# Altium PCB OLED_Board.PcbDoc
Units mil, origin at the board's own origin, x right, y up, seen from the top; angles counter-clockwise.
Board outline 1360 x 485 mil, 2 copper layers (Top Layer, Bottom Layer); 16 components, 13 nets, 47 pads, 48 vias.
Unrouted connection lines stored in the file: 9.
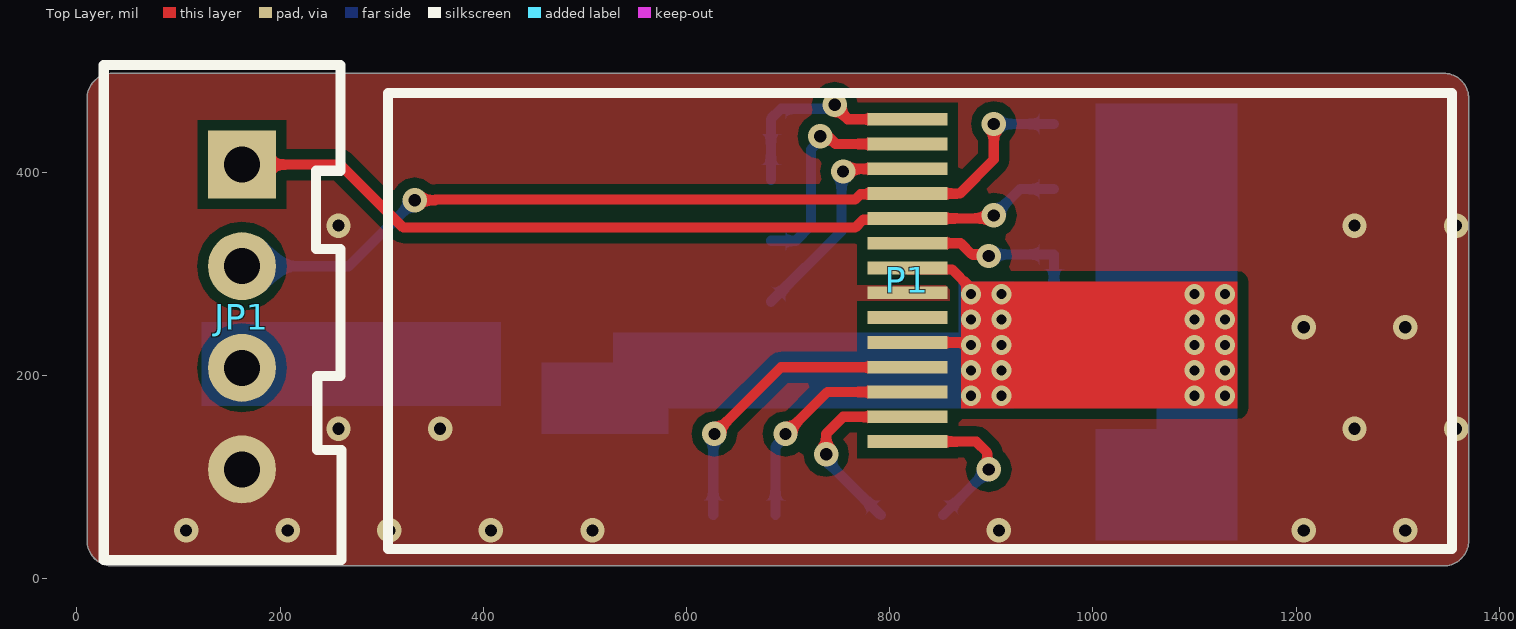
[diagram p0: Top Layer view]
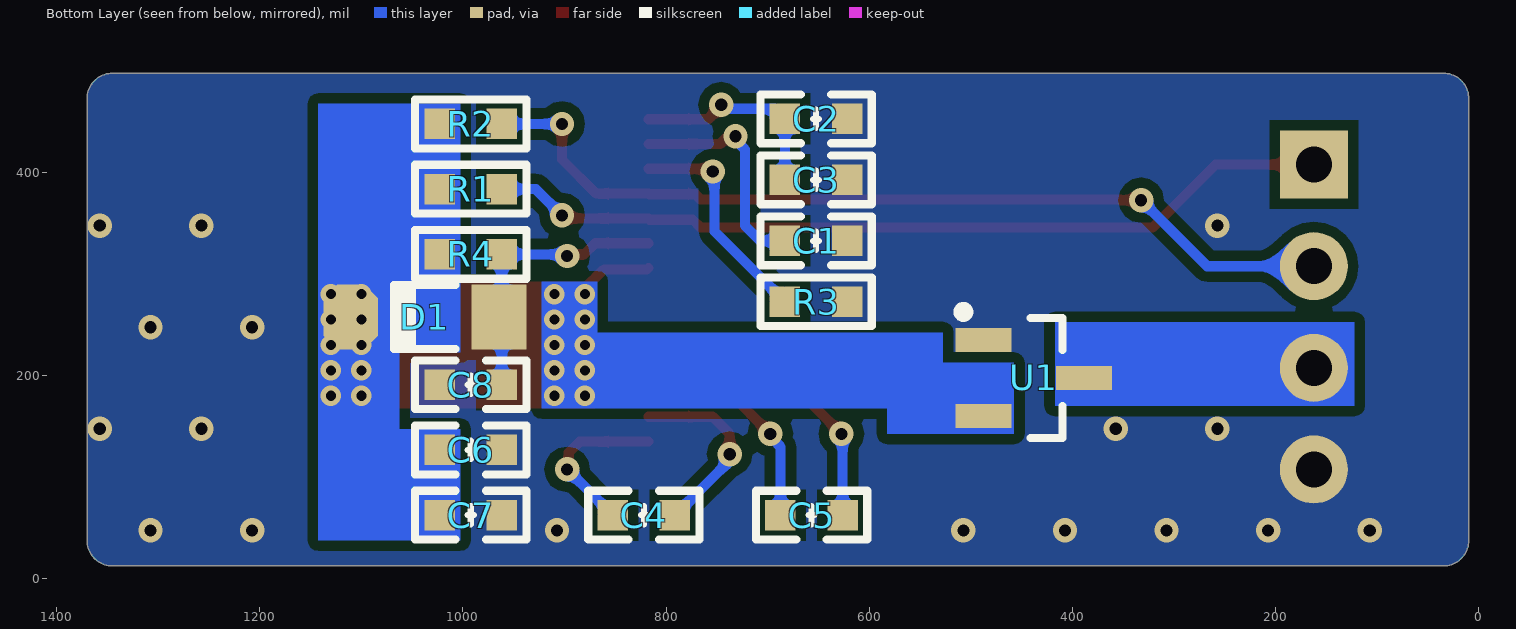
[diagram p1: Bottom Layer view, seen from below]
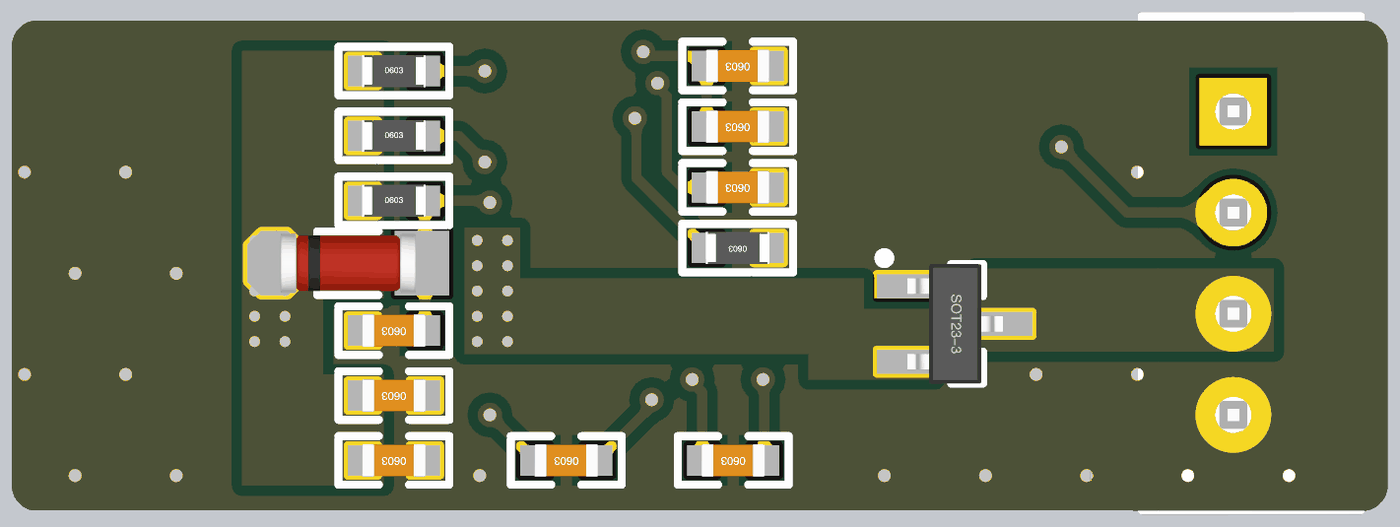
[diagram p2: 3D render of the assembled board from below, using the file's embedded part models]

## Layer stack, top to bottom
Top Solder: solder mask 0.4, Solder Resist, Dk 3.5
Top Layer: signal copper 1.4
Dielectric 1: dielectric 12.6, FR-4, Dk 4.8
Bottom Layer: signal copper 1.4
Bottom Solder: solder mask 0.4, Solder Resist, Dk 3.5

## Board outline
10,37.5 10,472.5 cw(c35,472.5) 35,497.5 1345,497.5 cw(c1345,472.5) 1370,472.5 1370,37.5 cw(c1345,37.5) 1345,12.5 35,12.5 cw(c35,37.5)

## Design rules (kind name [scope] priority, off if disabled: settings)
Clearance [All] p1: gap=10 ignorepadtopadclearanceinfootprint=FALSE except(0: Arc-Hole Track-Hole SMDPad-Hole THPad-Hole Via-Hole Fill-Hole Poly-Hole Region-Hole Text-Hole)
PolygonConnect [All] p1: connectstyle=Direct reliefconductorwidth=10 reliefentries=4 polygonreliefangle="90 Angle" airgapwidth=10
RoutingVias [All] p1: holewidth=28 width=50 viastyle="Through Hole" minholewidth=10 minwidth=20 maxholewidth=28 maxwidth=50
SolderMaskExpansion [All] p1: expansion=4
Width [All] p1: maxlimit=10 minlimit=10 preferedwidth=10
30 further rules are at their usual default settings.

## Components (designator, comment, footprint, x,y, rotation, side; value= is the part's Value field where it differs from the comment)
C1 "2.2uF" "C 0603_L" 652.5,332.5 r0 bottom
C2 "4.7uF" "C 0603_L" 652.5,452.5 r0 bottom
C3 "0.1uF" "C 0603_L" 652.5,392.5 r0 bottom
C4 "1uF" "C 0603_L" 821.91,62.5 r0 bottom
C5 "1uF" "C 0603_L" 656.91,62.5 r0 bottom
C6 "4.7uF" "C 0603_L" 992.32,126.67 r0 bottom
C7 "0.1uF" "C 0603_L" 992.32,62.5 r0 bottom
C8 "4.7uF" "C 0603_L" 992.32,190.83 r0 bottom
D1 "1N4148" "MINI_MELF (LL34)" 1037.5,257.5 r0 bottom
JP1 "HDR-1X4" XH2.54-LI-4P 162.5,257.5 r270 top
P1 "OLED" OLED 817.5,293.09 r90 top locked
R1 "4.7K" "R 0603_L" 992.32,383.33 r180 bottom
R2 "4.7K" "R 0603_L" 992.32,447.5 r180 bottom
R3 "560K" "R 0603_L" 652.5,272.5 r0 bottom
R4 "4.7K" "R 0603_L" 992.32,319.17 r180 bottom
U1 "XC6206P" SOT23-3M 487.5,197.5 r270 bottom

## Footprints (in the part's own frame and the unit in brackets; to place one, negate y for a bottom-side part, rotate by r counter-clockwise, add the part's x,y. Pads: shape width x height; smd on the part's side, far side on the other; paste and mask are expansions set on the pad)
"C 0603_L" [mil] "无极性贴片电容"
  rect 30x30 smd: 1(-30.59,0) 2(30.59,0)
  silkscreen extent -55,-24 55,24, body extent -31,-16 31,16, height 32
"MINI_MELF (LL34)" [mm] "1.5*3.4mm(直径，脚距）"
  rect 1.37x1.62 smd: 1(-1.855,0)
  oct 1.37x1.62 smd: 2(1.855,0)
  silkscreen extent -0.76,-0.8 0.78,0.8, body extent -1.7,-0.75 1.7,0.75, height 1.5
OLED [mm]
  rect 0.32x2 smd: 1(-4.019,0) 2(-3.399,0) 3(-2.779,0) 4(-2.159,0) 5(-1.539,0) 6(-0.919,0) 7(-0.299,0) 8(0.321,0) 9(0.941,0) 10(1.561,0) 11(2.181,0) 12(2.801,0) 13(3.421,0) 14(4.041,0)
  silkscreen extent -6.7,-13.62 4.7,12.98, body extent -6.77,-13.55 4.73,13.05, height 1.2
"R 0603_L" [mil] "1/10W贴片电阻"
  rect 30x30 smd: 1(-30.59,0) 2(30.59,0)
  silkscreen extent -55,-24 55,24, body extent -31,-16 31,16, height 16
SOT23-3M [mm] "3x1.3x1mm(长宽高)"
  rect 0.6x1.4 smd: 1(-0.95,0) 2(0.95,0) 3(0,2.514)
  silkscreen extent -1.78,-0.63 1.5,1.97, body extent -1.5,0.07 1.5,2.47, height 1.05
XH2.54-LI-4P [mm] "接插件，4P"
  rect 1.7x1.7 hole 0.9: 1(-3.81,0)
  round 1.7 hole 0.9: 2(-1.27,0) 3(1.27,0) 4(3.81,0)
  silkscreen extent -6.3,-3.45 6.07,2.49, body extent -6.31,-3.3 6.31,2.4, height 7.03

## Part data
C1 C2 C3 C4 C5 C6 C7 C8: library part C, "无极性贴片电容"
D1: "高速开关二极管"
JP1: library part "Header 4", "4P接插件", BOM名称=4P接插件
R1 R2 R3 R4: library part R, "贴片电阻"

## Via types
v1: diameter 24, hole 12, Top Layer to Bottom Layer, tented both sides, 28 vias
v2: diameter 20/20 (per signal layer), hole 10, Top Layer to Bottom Layer, tented both sides, 20 vias

## Nets (pads, with @x,y where several pads share a name; then routed paths per layer and width w, separated by ;. In a path a pad name is that pad's centre, name@x,y a point inside that pad or via, vN(x,y) a via of type N, cw(c..) or ccw(c..) an arc to the next point about the centre after c; other vN are vias at no path point)
+5: JP1.3 U1.3
GND: C1.1 C2.1 C3.1 C6.1 C7.1 C8.2 JP1.4 P1.7 R3.1 U1.1
  other v1: 107.5,47.5 207.5,47.5 307.5,47.5 407.5,47.5 507.5,47.5 907.5,47.5 1207.5,47.5 1307.5,47.5 257.5,147.5 357.5,147.5 1257.5,147.5 1357.5,147.5 1207.5,247.5 1307.5,247.5 257.5,347.5 1257.5,347.5 1357.5,347.5
NetC1_2: C1.2 P1.13 | length 226.4
  Top Layer w10: v1(731.73,435.5) 734.41,432.82 741.85,432.82 746.9,427.78 P1.13
  Bottom Layer w10: C1.2 707.5,332.5 722.5,347.5 722.5,422.48 731.73,431.71 v1(731.73,435.5)
NetC2_2: C2.2 C3.2 P1.14 | length 206.9
  Top Layer w10: v1(745.87,466.42) 745.87,465.04 758.73,452.18 P1.14
  Bottom Layer w10: C3.2 C2.2 693.09,462.5 738.16,462.5 742.08,466.42 v1(745.87,466.42)
NetC4_1: C4.1 P1.2 | length 189.2
  Top Layer w10: v1(737.5,122.5) 737.5,142.5 754.27,159.27 P1.2
  Bottom Layer w10: v1(737.5,122.5) 740.18,119.82 740.18,113.64 C4.1
NetC4_2: C4.2 P1.1 | length 163.8
  Top Layer w10: P1.1 885.14,134.86 895.91,124.09 895.91,109.09 v1(897.5,107.5)
  Bottom Layer w10: C4.2 v1(897.5,107.5)
NetC5_1: C5.1 P1.4 | length 297.7
  Top Layer w10: v1(627.5,142.5) 693.09,208.09 P1.4
  Bottom Layer w10: C5.1 626.32,141.32 v1(627.5,142.5)
NetC5_2: C5.2 P1.3 | length 221.2
  Top Layer w10: v1(697.5,142.5) 738.68,183.68 P1.3
  Bottom Layer w10: C5.2 687.5,129.64 697.5,139.64 v1(697.5,142.5)
NetC8_1: C8.1 D1.1 P1.9 R4.2 | length 278.5
  Top Layer w10: P1.9 869.86,330.14 880.91,319.09 895.91,319.09 v1(897.5,317.5)
  Bottom Layer w10: v1(897.5,317.5) 899.17,319.17 R4.2 C8.1
NetP1_12: P1.12 R3.2 | length 222.1
  Top Layer w10: v1(754.13,400.78) 756.73,403.37 P1.12
  Bottom Layer w10: R3.2 752.5,341.91 752.5,399.14 v1(754.13,400.78)
SCL: JP1.1 P1.10 R1.2 | length 840.6
  Top Layer w10: JP1.1 259.32,407.5 321.32,345.5 765.98,345.5 773.52,353.04 774.17,353.04 774.38,353.25 816.2,353.25 P1.10 895.76,354.55 898.71,357.5 v1(902.5,357.5)
  Bottom Layer w10: v1(902.5,357.5) 928.33,383.33 R1.2
SDA: JP1.2 P1.11 R2.2 | length 877.7
  Top Layer w10: v1(332.5,372.5) 352.5,372.5 353.04,373.04 765.89,373.04 771.21,378.36 816.91,378.36 P1.11 868.96,378.96 902.5,412.5 v1(902.5,447.5)
  Bottom Layer w10: JP1.2 267.5,307.5 v1(332.5,372.5) ; v1(902.5,447.5) R2.2
VCC: C6.2 C7.2 D1.2 P1.5 P1.8 R1.1 R2.1 R4.1 U1.2 | length 358.8
  Top Layer w10: P1.5 874.79,232.5 877.29,230 v2(880,230) ; P1.8 818.8,304.43 861.27,304.43 878.09,287.61 878.09,281.91 v2(880,280)
  Bottom Layer w10: 725,205 787.5,205 815,177.5 v2@877.5,177.5 ; v2@880,277.5 880,272.5 895,257.5 910,272.5 v2(910,280)
  other v2: 880,180 910,180 1100,180 1130,180 880,205 910,205 1100,205 1130,205 910,230 1100,230 1130,230 880,255 910,255 1100,255 1130,255 1100,280 1130,280
pads on no net: P1.6

## Polygon pours and split planes (outlines as drawn)
GND on Top Layer "GND_L01_P000" (solid, pour order 0): 10,37.5 10,472.5 cw(c35,472.5) 35,497.5 1345,497.5 cw(c1345,472.5) 1370,472.5 1370,37.5 cw(c1345,37.5) 1345,12.5 35,12.5 cw(c35,37.5)
GND on Bottom Layer "GND_L02_P001" (solid, pour order 1): 10,37.5 10,472.5 cw(c35,472.5) 35,497.5 1345,497.5 cw(c1345,472.5) 1370,472.5 1370,37.5 cw(c1345,37.5) 1345,12.5 35,12.5 cw(c35,37.5)

## Other copper
Top Layer:
  rectangle net VCC: 870,167.5 1142.5,292.5
Bottom Layer:
  rectangle net +5: 122.5,170 417.5,252.5
  rectangle net VCC: 867.5,222.5 922.5,292.5
  rectangle net VCC: 527.5,167.5 922.5,242.5
  rectangle net VCC: 457.5,142.5 582.5,212.5
  rectangle net VCC: 1062.5,112.5 1142.5,237.5
  rectangle net VCC: 1002.5,37.5 1142.5,147.5
  rectangle net VCC: 1002.5,222.5 1142.5,467.5

## Silkscreen, mask and mechanical layers (free items; w line width, h text height)
Mechanical 1:
  the board outline again, w10